# Altium PCB cs301_YourGroupNumber.PcbDoc
Units mm, origin at the board's own origin, x right, y up, seen from the top; angles counter-clockwise.
Board outline 274.95 x 168.53 mm, 2 copper layers (Top Layer, Bottom Layer); 86 components, 64 nets, 340 pads, 0 vias.
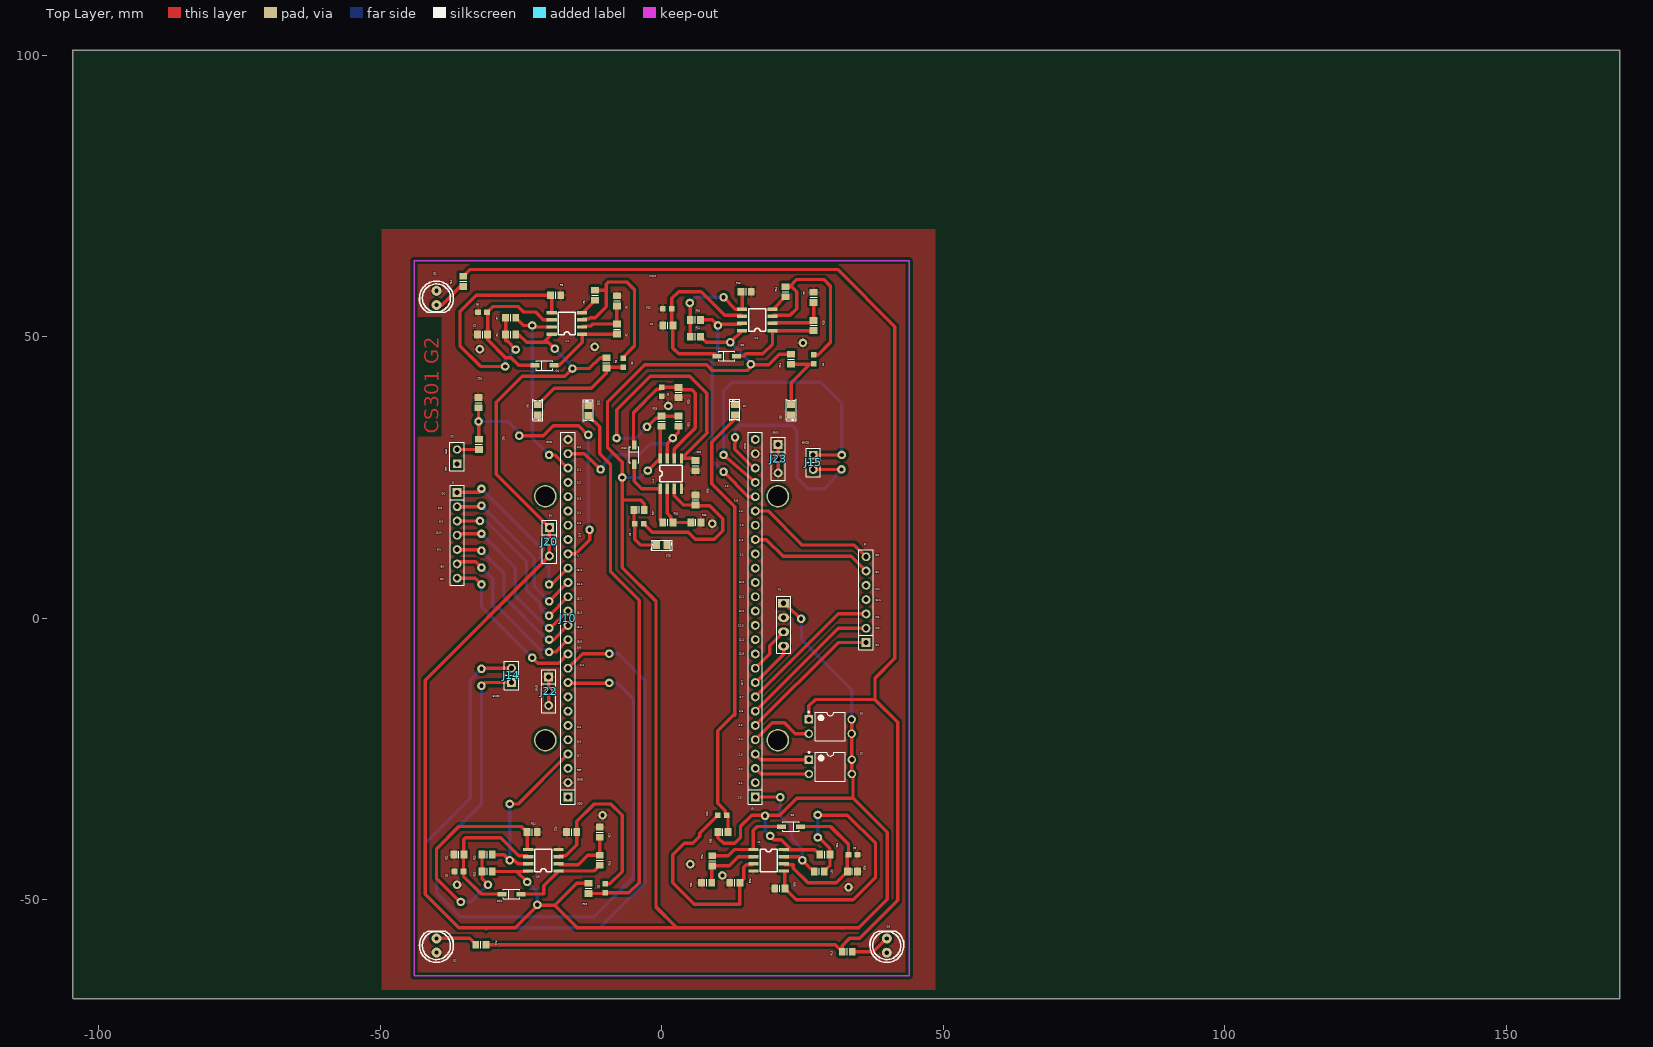
[diagram p0: Top Layer view]
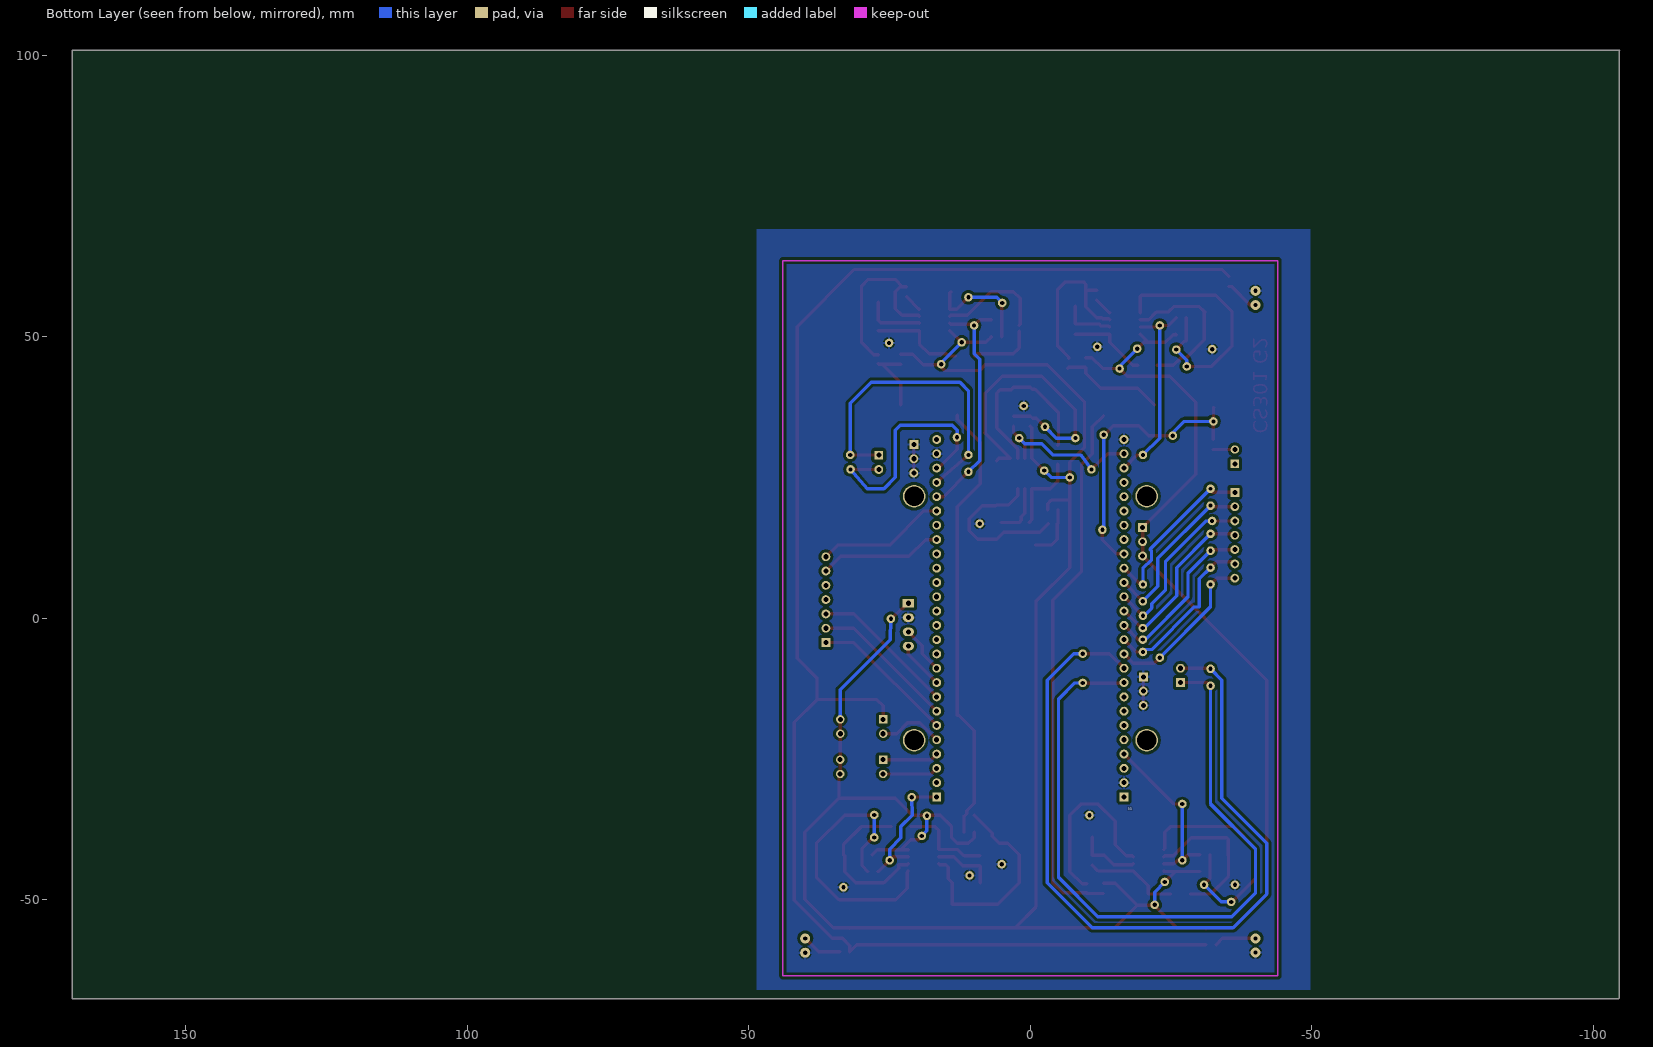
[diagram p1: Bottom Layer view, seen from below]
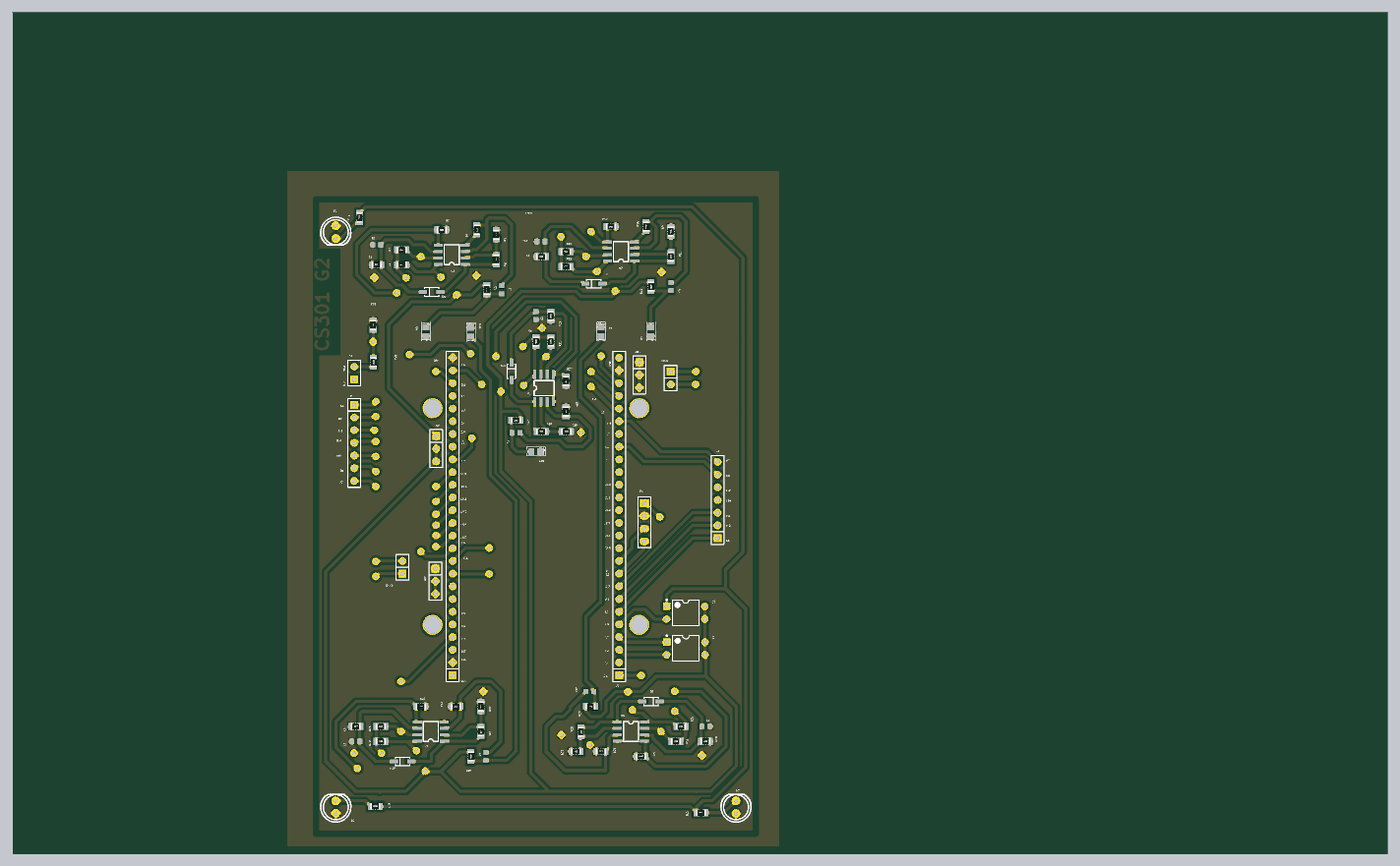
[diagram p2: 3D render of the assembled board from above, using the file's embedded part models]

## Layer stack, top to bottom
Top Solder: solder mask 0.0102, Solder Resist, Dk 3.5
Top Layer: signal copper 0.0356
Dielectric1: dielectric 0.32, FR-4, Dk 4.8
Bottom Layer: signal copper 0.0356
Bottom Solder: solder mask 0.0102, Solder Resist, Dk 3.5

## Board outline
-104.6,-67.48 -104.473,-67.607 170.228,-67.607 170.228,100.922 -104.727,100.922 -104.6,100.795 -104.6,-67.48

## Design rules (kind name [scope] priority, off if disabled: settings)
Clearance [All] p1: gap=0.5 ignorepadtopadclearanceinfootprint=FALSE
PolygonConnect [All] p1: connectstyle=Relief reliefconductorwidth=0.508 reliefentries=4 polygonreliefangle="90 Angle" airgapwidth=0.254
RoomDefinition cs301_YourGroupNumber [InComponentClass('cs301_YourGroupNumber')] p1: confinementstyle=ConfineIn formatcopy=TRUE lockcomponents=FALSE outline 48.625,69.1 -49.7,69.1 -49.7,-66.015 48.625,-66.015
RoutingVias [All] p1: holewidth=0.7 width=1.7 viastyle="Through Hole" minholewidth=0.6 minwidth=1.2 maxholewidth=1 maxwidth=2.2
SilkToSilkClearance [All] p1: silktosilkclearance=0.1
SilkToSolderMaskClearance SilkscreenOverComponentPads [IsPad] p1: minsilkscreentomaskgap=0.1 clearancetoexposedcopper=TRUE
SolderMaskExpansion [All] p1: expansion=0.102
Width [All] p1: maxlimit=0.7 minlimit=0.3 preferedwidth=0.6 minimp=50.000000 maximp=50.000000 favimp=50.000000
28 further rules are at their usual default settings.

## Components (designator, comment, footprint, x,y, rotation, side; value= is the part's Value field where it differs from the comment)
C1 "150nF" ECE-CAPC1608-0603SM 1,55 r180 top
C2 "150nF" ECE-CAPC1608-0603SM -31.821,54.365 r180 top
C3 "15nF" ECE-CAPC1608-0603SM -6.821,45.365 r90 top
C4 "15nF" ECE-CAPC1608-0603SM 27,46 r90 top
C5 "150nF" ECE-CAPC1608-0603SM -36,-45 r180 top
C6 "15nF" ECE-CAPC1608-0603SM -10,-48 r90 top
C7 "150nF" ECE-CAPC1608-0603SM 0,40.2 r270 top
C8 "15nF" ECE-CAPC1608-0603SM -4,16.75 r0 top
C9 "150nF" ECE-CAPC1608-0603SM 34,-42 r0 top
C10 "15nF" ECE-CAPC1608-0603SM 10.8,-35 r180 top
D1 "LED" LED0.1/5MM#1 -40,55.62 r180 top locked
D2 "LED" LED0.1/5MM#2 -40,-56.88 r0 top locked
D3 "LED" LED0.1/5MM#1 40,-56.88 r0 top locked
D4 "1N4148W-7-F" ECE-DIO-SOD123SM -20.825,44.925 r180 top
D5 "1N4148W-7-F" ECE-DIO-SOD123SM 23,-37 r0 top
D6 "TEMT6200" ECE-SENSOR-0805SM -22,37 r90 top
D7 "TEMT6200" ECE-SENSOR-0805SM 13,37 r270 top
D8 "1N4148W-7-F" ECE-DIO-SOD123SM 11.575,46.575 r180 top
D9 "TEMT6200" ECE-SENSOR-0805SM 23,37 r90 top
D10 "1N4148W-7-F" ECE-DIO-SOD123SM -26.65,-49 r180 top
D11 "TEMT6200" ECE-SENSOR-0805SM -13,36.9 r270 top
D12 "1N4148W-7-F" ECE-DIO-SOD123SM -4.875,29.05 r90 top
D13 "TEMT6200" ECE-SENSOR-0805SM 0,13 r180 top
J1 "CON7" SIP7 -36.322,22.352 r270 top locked
J2 "CON7" SIP7 36.322,-4.318 r90 top locked
J9 "26PIN" SIP26 16.637,-31.75 r90 top locked
J10 "26PIN" SIP26 -16.637,-31.75 r90 top locked
J14 "ENCD" sip2 -26.67,-11.43 r90 top locked
J15 "ENCD" sip2 26.924,28.956 r270 top locked
J20 "5V" sip3 -19.939,16.129 r270 top locked
J22 "GND" sip3 -20.066,-10.414 r270 top locked
J23 "GND" sip3 20.701,30.861 r270 top locked
P1 "Serial" ece-HDR1X4 21.675,2.655 r270 top
P2 "Serial" HDR1X2 -36.325,27.425 r90 top
R1 "10k" RESC2012-0805SM -7.941,56.365 r90 top
R2 "56k" RESC2012-0805SM -7.941,51.365 r90 top
R3 "100k" RESC2012-0805SM -9.821,45.365 r90 top
R4 "18k" RESC2012-0805SM -26.821,50.365 r0 top
R5 "820k" RESC2012-0805SM -31.821,50.365 r0 top
R6 "100k" RESC2012-0805SM -11.821,57.365 r90 top
R7 "27k" RESC2012-0805SM -26.821,53.365 r180 top
R8 "2.7k" RESC2012-0805SM -18.821,57.365 r180 top
R9 "10k" RESC2012-0805SM 27,57 r90 top
R10 "56k" RESC2012-0805SM 27,52 r90 top
R11 "100k" RESC2012-0805SM 23,46 r90 top
R12 "18k" RESC2012-0805SM 6,50 r0 top
R13 "820k" RESC2012-0805SM 1.1,52 r0 top
R14 "100k" RESC2012-0805SM 22,58 r90 top
R15 "27k" RESC2012-0805SM 6,53 r180 top
R16 "2.7k" RESC2012-0805SM 15,58 r180 top
R17 "10k" RESC2012-0805SM -11,-38 r90 top
R18 "56k" RESC2012-0805SM -11,-43 r90 top
R19 "100k" RESC2012-0805SM -13,-48 r90 top
R20 "18k" RESC2012-0805SM -31,-45 r0 top
R21 "820k" RESC2012-0805SM -36,-42 r0 top
R22 "100k" RESC2012-0805SM -16,-38 r0 top
R23 "27k" RESC2012-0805SM -31,-42 r180 top
R24 "2.7k" RESC2012-0805SM -23,-38 r180 top
R25 "10k" RESC2012-0805SM 6.1,17 r0 top
R26 "56k" RESC2012-0805SM 1.1,17 r0 top
R27 "100k" RESC2012-0805SM -4,19.25 r0 top
R28 "18k" RESC2012-0805SM 0,35 r270 top
R29 "820k" RESC2012-0805SM 3,40.1 r90 top
R30 "100k" RESC2012-0805SM 6,21 r270 top
R31 "27k" RESC2012-0805SM 3,35 r90 top
R32 "2.7k" RESC2012-0805SM 6,27.1 r90 top
R33 "10k" RESC2012-0805SM 8,-47 r180 top
R34 "56k" RESC2012-0805SM 9,-43.1 r270 top
R35 "100k" RESC2012-0805SM 10.9,-38 r180 top
R36 "18k" RESC2012-0805SM 29,-42 r180 top
R37 "820k" RESC2012-0805SM 33.9,-45 r180 top
R38 "100k" RESC2012-0805SM 13,-47 r0 top
R39 "27k" RESC2012-0805SM 28,-45 r0 top
R40 "2.7k" RESC2012-0805SM 21,-48 r0 top
R41 "47k" RESC2012-0805SM -32.475,30.875 r270 top value=27k
R42 "10k" RESC2012-0805SM -32.55,38.3 r270 top value=27k
RL1 "150K" RESC2012-0805SM -35.25,59.825 r90 top
RL2 "150K" RESC2012-0805SM -32.1,-58 r0 top
RL3 "150K" RESC2012-0805SM 32.975,-59.25 r180 top
S1 "SW DIP-2" DIP-4 29.975,-26.4 r0 top
S2 "SW DIP-2" DIP-4 29.95,-19.25 r0 top
U1 "SMT-TLC082" SO-8 -16.821,52.365 r180 top
U2 "SMT-TLC082" SO-8 17,53 r180 top
U3 "SMT-TLC082" SO-8 -21,-43 r180 top
U4 "SMT-TLC082" SO-8 1.635,25.7 r90 top
U5 "SMT-TLC082" SO-8 19,-43 r0 top

## Footprints (in the part's own frame and the unit in brackets; to place one, negate y for a bottom-side part, rotate by r counter-clockwise, add the part's x,y. Pads: shape width x height; smd on the part's side, far side on the other; paste and mask are expansions set on the pad)
DIP-4 [mm] "DIP; 4 Leads; Row Spacing 7.62 mm; Pitch 2.54 mm"
  rect 1.5x1.5 hole 0.9: 1(-3.81,1.27)
  round 1.5 hole 0.9: 2(-3.81,-1.27) 3(3.81,-1.27) 4(3.81,1.27)
  silkscreen extent -3.93,-2.55 2.65,2.69, body extent -3.15,-2.5 3.15,2.5, height 5.6
ECE-CAPC1608-0603SM [mm] "Chip Capacitor, Body 1.6x0.8mm, IPC Medium Density"
  rect 1x1 smd: 1(-0.8,0) 2(0.8,0)
  body extent -0.87,-0.48 0.87,0.48, height 0.85
ECE-DIO-SOD123SM [mm] "SOD-123; 2 Leads; Body 2.7 x 1.6 mm, (LxW)"
  rect 1.6x0.8 smd: 1(-1.7,0) 2(1.7,0)
  silkscreen extent -1.45,-0.85 1.45,0.85
ece-HDR1X4 [mm] "Header 4 way"
  rect 1.5x2 hole 0.9: 1(0,0)
  oval 1.5x2 hole 0.9: 2(2.54,0) 3(5.08,0) 4(7.62,0)
  silkscreen extent -1.27,-1.27 8.89,1.27
ECE-SENSOR-0805SM [mm] "Chip Sensor, Body 2.0x1.3mm, IPC Medium Density"
  rect 1.2x1.4 smd: 1(-0.9,0) 2(0.9,0)
  silkscreen extent -1.91,-0.89 1.88,0.89
HDR1X2 [mm] "Connector; Header; 2 Position"
  rect 1.5x1.5 hole 0.9: 1(0,0)
  round 1.5 hole 0.9: 2(2.54,0)
  silkscreen extent -1.27,-1.27 3.81,1.27
LED0.1/5MM#1 [mil]
  round 70 hole 30: A(0,0) K(0,-100)
  silkscreen extent -118,-168 118,50
LED0.1/5MM#2 [mil]
  round 70 hole 30: A(0,0) K(0,-98.43)
  silkscreen extent -118,-168 118,50
RESC2012-0805SM [mm] "Chip Resistor, Body 2.0x1.3mm, IPC Medium Density"
  rect 1.2x1.4 smd: 1(-0.9,0) 2(0.9,0)
  silkscreen extent 0,-0.6 0,0.6, body extent -1,-0.62 1,0.63, height 0.5
sip2 [mil]
  rect 62x62 hole 35.43: 1(0,0)
  round 62 hole 35.43: 2(100,0)
  silkscreen extent -50,-50 150,50
sip3 [mil]
  rect 62x62 hole 35.43: 1(0,0)
  round 62 hole 35.43: 2(100,0) 3(200,0)
  silkscreen extent -50,-50 250,50
SIP7 [mil]
  rect 62x62 hole 35.43: 1(0,0)
  round 62 hole 35.43: 2(100,0) 3(200,0) 4(300,0) 5(400,0) 6(500,0) 7(600,0)
  silkscreen extent -50,-50 650,50
SIP26 [mil]
  rect 62x62 hole 35.43: 1(0,0)
  round 62 hole 35.43: 2(100,0) 3(200,0) 4(300,0) 5(400,0) 6(500,0) 7(600,0) 8(700,0) 9(800,0) 10(900,0) 11(1000,0) 12(1100,0) 13(1200,0) 14(1300,0) 15(1400,0) 16(1500,0) 17(1600,0) 18(1700,0) 19(1800,0) 20(1900,0) 21(2000,0) 22(2100,0) 23(2200,0) 24(2300,0) 25(2400,0) 26(2500,0)
  silkscreen extent -50,-50 2550,50
SO-8 [mm]
  rect 1.8x0.6 smd: 1(-2.7,1.905) 2(-2.7,0.635) 3(-2.7,-0.635) 4(-2.7,-1.905) 5(2.7,-1.905) 6(2.7,-0.635) 7(2.7,0.635) 8(2.7,1.905)
  silkscreen extent -1.5,-2 1.5,2, body extent -2,-2.5 2,2.5, height 1.8

## Part data
C1 C2 C5 C7 C9: library part CAP000625, "CAP CER 150nF 25V X7R SM0603", Manufactuer=TDK, Manufacturer-PN=C1608X7R1E154K080AA, Size/Package="0603 (1608 Metric)", Voltage/Current=25V, Assembly Method="Surface Mount", Category=Capacitor, Component Type=CAP-0603-150nF, Item Type=Item, Path="ece/ts/Lists/Stock Inventory", Status=Active, Supplier1=Digikey, Supplier1-PN=445-5190-2-ND, UoA Stock#=CAP000625
C3 C4 C6 C8 C10: library part CAP000619, "CAP CER 15nF 50V X7R SM0603", Manufactuer=Samsung, Manufacturer-PN=CL10B153KB8NNNC, Size/Package="0603 (1608 Metric)", Voltage/Current=50V, Assembly Method="Surface Mount", Category=Capacitor, Component Type=CAP-0603-15nF, Item Type=Item, Path="ece/ts/Lists/Stock Inventory", Status=Active, Supplier1=Digikey, Supplier1-PN=1276-1277-2-ND, UoA Stock#=CAP000619
D4 D5 D8 D10 D12: library part DIO000103, "DIODE GEN PURPOSE 300mA SM", Manufactuer="Diodes Incorporated", Size/Package=SOD123, Voltage/Current="300mA 100V", Assembly Method="Surface Mount", Category=Diode, Component Type=SOD123-4148, Datasheet Link=http://share.engineering.auckland.ac.nz/ece/ts/Student%20Documents/Diode-4148SM.pdf, Item Type=Item, Manufacturer-PN=1N4148W-7-F, Path="ece/ts/Lists/Stock Inventory", Status=Active, Supplier1=Digikey, Supplier1-PN=1N4148W-FDITR-ND, UoA Stock#=DIO000103
D6 D7 D9 D11 D13: library part OTH000001, "LIGHT SENSOR TEMT6200 SM", Manufactuer=Vishay, Manufacturer-PN=TEMT6200FX01, Size/Package=0805/2012, Assembly Method="Surface Mount", Category=Other, Component Type=SEN-0805-TEMT6200, Datasheet Link=http://share.engineering.auckland.ac.nz/ece/ts/Student%20Documents/temt6200.pdf, Item Type=Item, Path="ece/ts/Lists/Stock Inventory", Revision="July-2002: Re-released for DXP Platform.", Status="Non Stocked", Supplier1=Digikey, Supplier1-PN=751-1056-1-ND, UoA Stock#=OTH000001
J1 J2: "Connector"
J14 J15: library part CON2, "Connector"
J20 J22 J23: library part CON3, "Connector"
P1: library part "Header 4", "Header, 4-Pin", LatestRevisionDate=17-Jul-2002, LatestRevisionNote="Re-released for DXP Platform.", Publisher="Altium Limited"
P2: library part "Header 2", "Header, 2-Pin", LatestRevisionDate=17-Jul-2002, LatestRevisionNote="Re-released for DXP Platform.", Publisher="Altium Limited"
R1 R2 R3 R4 R5 R6 R7 R8 R9 R10 R11 R12 R13 R14 R15 R16 R17 R18 R19 R20 R21 R22 R23 R24 R25 R26 R27 R28 R29 R30 R31 R32 R33 R34 R35 R36 R37 R38 R39 R40 R41 R42 RL1 RL2 RL3: library part "Res SM 0805", "SM resistor"
S1 S2: "DIP Switch, 2 Position, SPST", LatestRevisionDate=17-Jul-2002, LatestRevisionNote="Re-released for DXP Platform.", PackageReference=DIP-4, Published=24-Mar-1999, Publisher="Altium Limited"

## Free pads (board coordinates)
  round 4 hole 3.5 unplated: 1(-20.65,-21.666) 1(-20.65,21.666) 1(20.65,-21.666) 1(20.65,21.666)
  round 1.524 hole 0.762: 4(-23,52) 5(10,52) 6(-20,29) 7(11,26) 8(2,32) 9(-10.85,26.425) 10(25,-43) 11(21.075,-31.8) 12(-27,-43) 13(-27,-33) 14(-32,-9) 15(-32,-12) 16(11,57) 17(5,56) 22(-32,12) 24(-32,6) 25(-32,9) 27(-20,6) 28(-19.987,3) 29(-19.975,-1.75) 30(-19.975,-3.8) 31(-20,-6) 32(-20,0.447) 33(-23,-7) 34(11,29) 35(13.05,32.125) 36(32,29) 37(31.95,26.425) 38(-9.3,-6.3) 39(-9.3,-11.5) 40(-11.9,48.2) 41(5.1,-43.7) 42(25.1,48.9) 43(9,16.8) 44(-10.5,-35) 45(-32.3,47.8) 46(1.2,37.7) 47(-36.35,-47.35) 48(33.2,-47.8) 49(10.8,-45.7) 50(12.205,49) 51(15.85,45.125) 53(-15.85,44.35) 54(-25.925,47.725) 55(-27.8,44.719) 56(-18.975,47.875) 57(-2.45,26.225) 58(-7,25) 59(-2.6,34) 60(-8,32) 61(-23.875,-46.85) 62(-22.075,-50.925) 63(-30.85,-47.35) 66(-35.675,-50.4) 67(27.75,-38.95) 68(27.725,-34.95) 69(19.275,-38.675) 70(18.375,-35.1) 73(24.775,-0.1) 74(-32.525,34.95) 75(-25.3,32.425) 76(-13.025,32.575) 77(-12.8,15.7)
  round 1.524 hole 0.7: 18(-32,23) 19(-32,20) 20(-32.272,17.272) 21(-32,15)

## Nets (pads, with @x,y where several pads share a name; then routed paths per layer and width w, separated by ;. In a path a pad name is that pad's centre, name@x,y a point inside that pad or via, vN(x,y) a via of type N, cw(c..) or ccw(c..) an arc to the next point about the centre after c; other vN are vias at no path point)
DIP0: J9.4 S1.1 | length 9.9
  Top Layer w0.6: J9.4 17.637,-25.13 S1.1
DIP1: J9.3 S1.2 | length 9.9
  Top Layer w0.6: J9.3 17.637,-27.67 S1.2
DIP2: RL1.2 RL2.2 RL3.2 S2.1 | length 279.1
  Top Layer w0.6: RL1.2 -34.025,61.95 31.25,61.95 41.4,51.8 41.4,-7.15 37.9,-10.65 37.9,-14.45 ; RL2.2 30.825,-58 RL3.2 32.075,-58.15 33.375,-56.85 35.225,-56.85 41.95,-50.125 41.95,-18.5 37.9,-14.45 ; S2.1 26.14,-15.56 27.25,-14.45 37.9,-14.45
DIP3: J9.5 S2.2 | length 11.5
  Top Layer w0.6: J9.5 19.627,-18.6 21.825,-18.6 23.745,-20.52 S2.2
ENCD_J14_1: J10.9 J14.1 pad.15 pad.39 | length 130.2
  Top Layer w0.6: pad.15 -31.43,-11.43 J14.1 ; J10.9 -16.51,-11.557 -9.3,-11.557 pad.39
  Bottom Layer w0.6: pad.15 -32,-33 -40,-41 -40,-48.8 -35.8,-53 -12,-53 -5,-46 -5,-14.4 -7.9,-11.5 pad.39 ; J10.9 J10.9@-16.32,-11.43
ENCD_J14_2: J10.10 J14.2 pad.14 pad.38 | length 147
  Top Layer w0.6: pad.14 -31.89,-8.89 J14.2 ; J10.10 -14.047,-6.3 pad.38
  Bottom Layer w0.6: pad.14 -34,-11 -34,-32 -42,-40 -42,-49 -36,-55 -11,-55 -3,-47 -3,-11 -7.7,-6.3 pad.38
ENCD_J15_1: J9.23 J15.1 pad.34 pad.36 | length 56.3
  Top Layer w0.6: pad.34 J9.23 ; J15.1 pad.36
  Bottom Layer w0.6: pad.34 11,40.413 12.497,41.91 28.245,41.91 32,38.155 pad.36
ENCD_J15_2: J9.24 J15.2 pad.35 pad.37 | length 43.9
  Top Layer w0.6: pad.35 13,30 16.33,26.67 J9.24 ; J15.2 pad.37
  Bottom Layer w0.6: pad.35 13,33.396 13.868,34.265 23.136,34.265 24,33.401 24,25 26,23 29,23 pad.37
GND: C1.2 C2.2 C5.2 C7.2 C9.2 D1.K D2.K D3.K D6.1 D7.1 D9.1 D11.1 D13.1 J9.25 J10.2 J10.26 J22.1 J22.2 J22.3 J23.1 J23.2 J23.3 P1.2 pad.40 pad.41 pad.42 pad.43 pad.44 pad.45 pad.46 pad.47 pad.48 pad.49 R1.2 R5.1 R6.1 R8.1 R9.2 R13.1 R14.1 R16.1 R17.2 R21.1 R22.1 R24.1 R25.2 R29.1 R30.1 R32.1 R33.2 R37.1 R38.1 R40.1 R42.1 U1.4 U2.4 U3.4 U4.4 U5.4 | length 16.6
  Top Layer w0.6: J22.3 J22.2 J22.1 ; U1.4 -14.016,54.27 R6.1 ; U2.4 19.805,54.905 R14.1 ; J23.3 J23.2 J23.1
J1_1: J1.7 J10.11 pad.24 pad.33 | length 29
  Top Layer w0.6: J1.7 -33.112,7.112 pad.24 ; pad.33 -22,-8 -18.287,-8 J10.11
  Bottom Layer w0.6: pad.24 -32,2 pad.33
J1_2: J1.6 J10.12 pad.25 pad.31 | length 30.3
  Top Layer w0.6: J1.6 -35.974,10 -33,10 pad.25 ; pad.31 -18.827,-6 J10.12
  Bottom Layer w0.6: pad.25 -30,7 -30,2 -29.124,2 -21.562,-5.562 -20.438,-5.562 pad.31
J1_3: J1.5 J10.13 pad.22 pad.30 | length 30.1
  Top Layer w0.6: J1.5 -32.192,12.192 pad.22 ; pad.30 -19.167,-3.8 J10.13
  Bottom Layer w0.6: pad.22 -28,8 -28,3.791 -20.409,-3.8 pad.30 pad.30@-20.209,-4
J1_4: J1.4 J10.14 pad.21 pad.29 | length 30.9
  Top Layer w0.6: J1.4 -36.054,15 pad.21 ; pad.29 -19.75,-1.75 -16.73,1.27 J10.14
  Bottom Layer w0.6: pad.21 -26,9 -26,4 -20.25,-1.75 pad.29
J1_5: J1.3 J10.15 pad.20 pad.32 | length 31.4
  Top Layer w0.6: J1.3 pad.20 ; pad.32 J10.15
  Bottom Layer w0.6: pad.20 -31.272,17.272 -24,10 -24,5 -21.549,2.549 -21.549,1.804 -20.192,0.447 pad.32
J1_6: J1.2 J10.16 pad.19 pad.28 | length 31.1
  Top Layer w0.6: J1.2 -32.188,19.812 pad.19 ; pad.28 J10.16
  Bottom Layer w0.6: pad.19 -22.626,10.626 -22.626,5.639 pad.28
J1_7: J1.1 J10.17 pad.18 pad.27 | length 31
  Top Layer w0.6: J1.1 -32.352,22.352 pad.18 ; pad.27@-19.527,6 J10.17
  Bottom Layer w0.6: pad.18 -21.297,12.297 -21.297,12.164 -21.526,11.935 -21.526,10.391 -20,8.865 pad.27
J2_1: J2.1 J9.6 | length 25.8
  Top Layer w0.6: J9.6 31.369,-4.318 J2.1
J2_2: J2.2 J9.7 | length 25.8
  Top Layer w0.6: J9.7 31.369,-1.778 J2.2
J2_3: J2.3 J9.8 | length 25.8
  Top Layer w0.6: J9.8 31.369,0.762 J2.3
J2_6: J2.6 J9.19 | length 22
  Top Layer w0.6: J9.19 18.595,13.97 21.565,11 33.704,11 J2.6
J2_7: J2.7 J9.21 | length 23.1
  Top Layer w0.6: J9.21 18.95,19.05 25,13 34.244,13 J2.7
NetC1_1: C1.1 D8.2 R13.2 U2.6 | length 31.2
  Top Layer w0.6: 2,51 2,48 3,47 9.45,47 D8.2 ; R13.2 1.8,52.2 C1.1 1.8,56.8 3,58 7,58 11.195,53.805 14.13,53.805 U2.6
NetC2_1: C2.1 D4.2 R5.2 U1.6 | length 28.1
  Top Layer w0.6: D4.2 -25.4,44.925 -26.756,46.281 -27.737,46.281 -30.921,49.465 R5.2 -30.921,54.265 C2.1 -30.021,55.365 -25.489,55.365 -24.521,54.396 -22.396,54.396 -21,53 U1.6
NetC3_1: C3.1 D6.2 R3.1 | length 18.8
  Top Layer w0.6: D6.2 -22,37.925 -19.088,40.838 -12.462,40.838 -9.821,43.479 R3.1 -9.721,44.565 C3.1 C3.1@-6.621,44.365
NetC3_2: C3.2 R6.2 U1.3 | length 30.1
  Top Layer w0.6: U1.3 -13.951,53.17 -12.889,53.17 -12.694,53.365 -11.82,53.365 -9.821,55.365 -9.821,58.365 ; R6.2 -9.921,58.265 -9.821,58.365 ; C3.2 -6.821,46.365 -4.821,48.365 -4.821,58.365 -6.181,59.725 -9.461,59.725 -9.821,59.365 -9.821,58.365
NetC4_1: C4.1 D9.2 R11.1 | length 12.6
  Top Layer w0.6: D9.2 23,41.825 26.275,45.1 ; R11.1 26.275,45.1 ; C4.1 26.9,45.1 26.275,45.1
NetC4_2: C4.2 R14.2 U2.3 | length 32.4
  Top Layer w0.6: U2.3 19.87,53.805 22.805,53.805 24,55 24,58 23.1,58.9 22.725,58.9 ; R14.2 22.725,58.9 ; C4.2 27.8,46.8 30,49 30,59 28.825,60.175 24,60.175 22.725,58.9
NetC5_1: C5.1 D10.2 R21.2 U3.6 | length 27.7
  Top Layer w0.6: D10.2 -32,-49 -35.2,-45.8 C5.1 -35.2,-42.1 R21.2 -35.125,-41.975 -35.125,-39.275 -34.85,-39 -28.595,-39 -25.4,-42.195 -23.87,-42.195 U3.6
NetC6_1: C6.1 D11.2 R19.1 | length 96.5
  Top Layer w0.6: R19.1 -10.1,-48.9 C6.1 -5.8,-48.8 -4,-47 -4,3.15 -9.075,8.225 -9.075,27.3 -11.025,29.25 -11.025,34.025 D11.2
NetC6_2: C6.2 R22.2 U3.3 | length 32.3
  Top Layer w0.6: U3.3 -18.13,-42.195 -17.069,-42.195 -15.1,-40.226 R22.2 -15.1,-36.1 -12,-33 -9,-33 -7,-35 -7,-45 -9.2,-47.2 C6.2
NetC7_1: C7.1 D12.2 R29.2 U4.6 | length 32.2
  Top Layer w0.6: D12.2 -5,30.875 -5,36.531 -0.831,40.7 -0.3,40.7 C7.1 R29.2 3.4,40.6 5.4,40.6 6,40 6,33.791 2.27,30.061 U4.6
NetC8_1: C8.1 D13.2 R27.1 | length 9.6
  Top Layer w0.6: R27.1 -4.9,16.85 C8.1 -4.8,14.05 -3.75,13 D13.2
NetC8_2: C8.2 R30.2 U4.3 | length 29.5
  Top Layer w0.6: C8.2 -1.7,15.25 4.75,15.25 6,14 9.35,14 10.85,15.5 10.85,17.7 8.55,20 6.1,20 R30.2 3.9,20.1 2.27,21.73 U4.3
NetC9_1: C9.1 D5.2 R37.2 U5.6 | length 28.6
  Top Layer w0.6: U5.6 21.87,-43.805 23.4,-43.805 23.4,-44.4 26,-47 31,-47 R37.2 33,-42.2 C9.1 33.2,-40.2 30,-37 D5.2
NetC10_1: C10.1 D7.2 R35.1 | length 79.6
  Top Layer w0.6: R35.1 11.8,-35.2 C10.1 11.3,-34.7 11.3,-34.169 10,-32.869 10,-20 12.75,-17.25 12.975,-17.25 12.975,19.8 8.9,23.875 8.9,31.225 13,35.325 D7.2
NetC10_2: C10.2 R38.2 U5.3 | length 38.4
  Top Layer w0.6: C10.2 6.8,-38.2 6.8,-38.7 5.5,-40 4,-40 2,-42 2,-47 5.8,-50.8 13.9,-50.8 R38.2 14.6,-46.3 14.6,-44.274 15.069,-43.805 16.13,-43.805 U5.3
NetD1_A: D1.A RL1.1 | length 6.1
  Top Layer w0.6: D1.A -39.08,55.62 -35.775,58.925 RL1.1
NetD2_A: D2.A RL2.1 | length 7.5
  Top Layer w0.6: D2.A -34.12,-56.88 RL2.1
NetD3_A: D3.A RL3.1 | length 7.1
  Top Layer w0.6: RL3.1 37.63,-59.25 D3.A
NetD4_1: D4.1 R2.1 U1.1 | length 14.3
  Top Layer w0.6: D4.1 -18.181,44.925 -14.121,48.985 U1.1 -14.115,50.465 R2.1
NetD5_1: D5.1 R34.1 U5.1 | length 16.4
  Top Layer w0.6: R34.1 11.8,-42.2 12.905,-41.095 U5.1 16.3,-37.7 17,-37 D5.1
NetD8_1: D8.1 R10.1 U2.1 | length 17
  Top Layer w0.6: D8.1 14.55,46.575 14.975,47 18,47 19.7,48.7 U2.1 26.995,51.095 R10.1
NetD10_1: D10.1 R18.1 U3.1 | length 16.9
  Top Layer w0.6: D10.1 -20.92,-49 -20.92,-47.525 U3.1 -12.005,-44.905 R18.1
NetD12_1: D12.1 R26.1 U4.1 | length 14.4
  Top Layer w0.6: D12.1 -4.875,24.35 -3.525,23 U4.1 -0.27,17.47 R26.1
NetP2_2: P2.2 R41.2 | length 3.9
  Top Layer w0.6: P2.2 -32.485,29.965 R41.2
NetR1_1: R1.1 R2.2 U1.2 | length 9.6
  Top Layer w0.6: U1.2 -13.951,51.9 -12.604,51.9 -12.238,52.265 R2.2 R1.1
NetR4_1: pad.54 pad.55 R4.1 R7.2 R8.2 U1.5 | length 46.4
  Top Layer w0.6: pad.55 -32.175,44.719 -35.821,48.365 -35.821,54.479 -32.935,57.365 R8.2 -19.521,57.165 U1.5 ; R7.2 R4.1 -27.721,49.265 -27.465,49.265 pad.54
  Bottom Layer w0.6: pad.55 -27.8,45.85 pad.54
NetR9_1: R9.1 R10.2 U2.2 | length 10.8
  Top Layer w0.6: U2.2 19.7,52.5 26.6,52.5 R10.2 R9.1
NetR12_1: pad.16 pad.17 R12.1 R15.2 R16.2 U2.5 | length 19.8
  Top Layer w0.6: pad.17 5.1,55.9 R15.2 R12.1 ; pad.16 13.095,54.905 U2.5 14.3,57.8 R16.2
  Bottom Layer w0.6: pad.17 6,57 pad.16
NetR17_1: R17.1 R18.2 U3.2 | length 11.3
  Top Layer w0.6: U3.2 -18.13,-43.805 -14.805,-43.805 -13.1,-42.1 R18.2 R17.1
NetR20_1: pad.63 pad.66 R20.1 R23.2 R24.2 U3.5 | length 44.6
  Top Layer w0.6: pad.66@-35.6,-50.6 -35.738,-50.463 -40,-46.2 -40,-41 -36,-37 -24.9,-37 R24.2 -23.9,-40.895 U3.5 ; R23.2 R20.1 -31.9,-46.3 pad.63
  Bottom Layer w0.6: pad.66 -33.9,-50.4 pad.63
NetR25_1: R25.1 R26.2 U4.2 | length 9.6
  Top Layer w0.6: U4.2 1,18.631 1.6,18.031 1.6,17.4 R26.2 R25.1
NetR28_1: pad.59 pad.60 R28.1 R31.2 R32.2 U4.5 | length 53.5
  Top Layer w0.6: pad.60 -8,37 -2,43 5,43 8,40 8,33 8.07,32.93 U4.5 5.6,28.4 R32.2 ; pad.59 -2.531,34 -1.031,35.5 -0.4,35.5 R28.1 R31.2
  Bottom Layer w0.6: pad.60 -4.6,32 pad.59
NetR33_1: R33.1 R34.2 U5.2 | length 11
  Top Layer w0.6: R33.1 8.9,-44.1 R34.2 12,-44 13.635,-42.365 U5.2
NetR36_1: pad.67 pad.68 R36.1 R39.2 R40.2 U5.5 | length 51.8
  Top Layer w0.6: U5.5 21.9,-45.105 R40.2 23.9,-50 34,-50 38,-46 38,-40 33,-35 pad.68@27.525,-35 ; pad.67 28,-39 29.9,-40.9 R36.1 29.9,-44 R39.2
  Bottom Layer w0.6: pad.68 27.725,-38.925 pad.67
RX: J9.10 P1.3 | length 8.6
  Top Layer w0.6: J9.10 19.225,-6.302 19.225,-4.875 P1.3
TX: J9.9 P1.4 | length 8.6
  Top Layer w0.6: J9.9 21.675,-6.392 P1.4
Vbat: J10.18 pad.74 pad.75 pad.76 pad.77 R41.1 R42.2 | length 51.6
  Top Layer w0.6: R42.2 -32.525,37.375 pad.74 -32.475,34.9 R41.1 ; pad.75 -21.025,32.425 -19.275,34.175 -14.725,34.175 pad.76@-13,32.45 ; J10.18 -15.27,11.43 -12.8,13.9 pad.77
  Bottom Layer w0.6: pad.74 -27.325,34.95 -25.3,32.925 pad.75 ; pad.76 -13.025,15.925 pad.77
VCC: J20.1 J20.2 J20.3 P1.1 pad.50 pad.51 pad.53 pad.56 pad.57 pad.58 pad.61 pad.62 pad.69 pad.70 pad.73 R3.2 R4.2 R11.2 R12.2 R19.2 R20.2 R27.2 R28.2 R35.2 R36.2 S1.3 S1.4 S2.3 S2.4 U1.8 U2.8 U3.8 U4.8 U5.8 | length 524.8
  Top Layer w0.6: -31.2,-55.2 -31,-55 ; R20.2 -25.725,-45 ; R4.2@-25.826,50.46 R4.2 -25.365,50.365 -24,49 -20.981,49 ; pad.61 -25.725,-45 ; U3.8 -23.795,-45 -25.725,-45 ; pad.62 pad.62@-22,-51 ; U1.8 -20.981,49 ; pad.56 -20.1,49 -20.981,49 ; R19.2 -15.1,-47.1 -19,-51 ; R3.2 -10.921,46.265 -12.821,44.365 -15.821,44.365 -17.186,43 -24.8,43 -29.4,38.4 -29.4,25.59 J20.1 J20.2 J20.3 -42,-11.012 -42,-49 -36,-55 -31,-55 ; R27.2 -3.1,20.35 -3.75,21 -7,21 ; pad.57 -2.445,26.225 U4.8 -0.27,33.83 R28.2 ; R12.2@7,50 R12.2 7.9,49 pad.50 U2.8 ; R35.2 10,-39 10.995,-39.995 13.005,-39.995 14,-39 14,-37 16,-35 21,-35 24,-32 34,-32 ; pad.69 19.925,-39.325 21.275,-39.325 23.05,-41.1 ; P1.1 pad.73 ; U5.8 21.705,-41.1 23.05,-41.1 ; R11.2 20.9,46.9 19,45 16.205,45 15.205,44 9,44 8,45 -3,45 -9.625,38.375 -9.625,30.35 -7,27.725 pad.58 -7,21 ; R36.2 27.2,-41.1 23.05,-41.1 ; 32.1,-55.1 32,-55 ; S2.4 S2.3 33.76,-25.105 S1.4 S1.3 34,-27.885 34,-32 ; -31,-55 -26,-55 pad.62@-22,-51 ; pad.62@-22,-51 -19,-51 ; -19,-51 -15,-55 2.7,-55 ; -7,21 -7,9 -1,3 -1,-51.3 2.7,-55 ; 2.7,-55 32,-55 ; 32,-55 35,-55 40.05,-49.95 40.05,-38.05 34,-32
  Bottom Layer w0.6: pad.61 -22.075,-48.65 pad.62 ; pad.56 -15.85,44.75 pad.53 ; pad.58 -3.675,25 pad.57 ; pad.50 15.85,45.355 pad.51 ; pad.70 18.375,-37.775 pad.69 ; pad.73 24.895,-3.845 33.76,-12.71 S2.4
Vout1: J10.24 pad.4 pad.6 R7.1 U1.7 | length 35.6
  Top Layer w0.6: R7.1 -24.556,52 pad.4 -22.73,51.73 U1.7 ; pad.6 -18.967,29 J10.24
  Bottom Layer w0.6: pad.4 -23,32 pad.6
Vout2: J9.22 pad.5 pad.7 R15.1 U2.7 | length 42.8
  Top Layer w0.6: R15.1 9,53 pad.5 10,52.195 14.13,52.195 U2.7 ; pad.7 15.41,21.59 J9.22
  Bottom Layer w0.6: pad.5 10,47 9,46 9,28 pad.7
Vout3: J10.25 pad.8 pad.9 R31.1 U4.7 | length 28.8
  Top Layer w0.6: J10.25 -13.785,29.21 pad.9 ; U4.7 1,31 pad.8 3,33 R31.1
  Bottom Layer w0.6: pad.9 -9,29 -4,29 -2,31 1,31 pad.8
Vout4: J10.4 pad.12 pad.13 R23.1 U3.7 | length 31.1
  Top Layer w0.6: R23.1 -28,-42 pad.12 -26.151,-43 -25.516,-43.635 U3.7 ; pad.13 -25.507,-33 J10.4
  Bottom Layer w0.6: pad.12 pad.13
Vout5: J9.1 pad.10 pad.11 R39.1 U5.7 | length 23.8
  Top Layer w0.6: J9.1 21.025,-31.75 pad.11 ; U5.7 24.365,-42.365 pad.10 27,-45 R39.1
  Bottom Layer w0.6: pad.11 21,-35 23,-37 23,-39 25,-41 pad.10
pads on no net: J2.4 J2.5 J9.2 J9.11 J9.12 J9.13 J9.14 J9.15 J9.16 J9.17 J9.18 J9.20 J9.26 J10.1 J10.3 J10.5 J10.6 J10.7 J10.8 J10.19 J10.20 J10.21 J10.22 J10.23 P2.1

## Polygon pours and split planes (outlines as drawn)
GND on Bottom Layer "GND Layer" (solid, pour order 18): -49.7,69.1 48.6,69.1 48.6,-66 -49.7,-66
GND on Top Layer "GND Layer" (solid, pour order 16): -49.7,69.1 48.625,69.1 48.625,-66.015 -49.7,-66.015

## Keep-outs
Keep-Out Layer:
  lines w0.254: -43.942,-63.5 -43.942,63.5 43.942,63.5 43.942,-63.5 -43.942,-63.5

## Other copper
Top Layer:
  text "CS301 G2" at -39.575,32.75 h2.5 r90

## Silkscreen, mask and mechanical layers (free items; w line width, h text height)
Top Overlay:
  text "Front" at -2.1,60.6 h0.35
  text "GND" at -20.5,31.1 h0.35
  text "3.0" at -15,30.2 h0.35
  text "GND" at 15,30 h0.35 r90
  text "Vbat" at -38.1,29 h0.35 r90
  text "3.1" at -14.986,26.162 h0.35
  text "Ibat" at -38.15,26.075 h0.35 r90
  text "3.2" at -15.025,23.875 h0.35
  text "1.6" at 11.2,23.3 h0.35
  text "D1" at -39.075,21.95 h0.35
  text "3.3" at -14.986,21.082 h0.35
  text "1.5" at 12.925,20.7 h0.35
  text "IN2" at -39.7,19.35 h0.35
  text "1.4" at 13.7,18.8 h0.35
  text "3.4" at -14.986,18.542 h0.35
  text "IN1" at -39.475,16.975 h0.35
  text "3.5" at -15.025,16.7 h0.35
  text "1.3" at 13.9,16.3 h0.35
  text "SLW" at -40,15 h0.35
  text "3.6" at -14.375,14.35 h0.35 r90
  text "1.2" at 13.8,13.7 h0.35
  text "INV" at -39.825,12 h0.35
  text "1.1" at 13.9,11.1 h0.35
  text "D2" at 38,11 h0.35
  text "3.7" at -14.986,10.922 h0.35
  text "EN" at -39.2,9 h0.35
  text "15.0" at -15.113,8.382 h0.35
  text "EN" at 38,8 h0.35
  text "D2" at -39.3,6.725 h0.35
  text "12.0" at 13.7,6.2 h0.35
  text "15.1" at -14.986,5.842 h0.35
  text "INV" at 38,5 h0.35
  text "12.1" at 13.7,3.6 h0.35
  text "15.2" at -15.113,3.302 h0.35
  text "SLW" at 38,3 h0.35
  text "12.2" at 13.7,1.1 h0.35
  text "15.3" at -15.113,0.762 h0.35
  text "IN1" at 38,0 h0.35
  text "12.3" at 13.6,-1.5 h0.35
  text "15.4" at -15.113,-1.778 h0.35
  text "IN2" at 38,-2 h0.35
  text "12.4" at 13.7,-4 h0.35
  text "15.5" at -15.113,-4.318 h0.35
  text "D1" at 38,-5 h0.35
  text "0.0" at -15,-5.4 h0.35
  text "12.5" at 13.7,-6.5 h0.35
  text "0.1" at -14.5,-8.5 h0.35
  text "12.7" at 14.5,-12 h0.35 r90
  text "2.7" at 13.9,-14.2 h0.35
  text "2.6" at 13.8,-16.7 h0.35
  text "2.5" at 13.7,-19.2 h0.35
  text "0.5" at -14.986,-19.558 h0.35
  text "2.4" at 13.7,-21.7 h0.35
  text "0.6" at -14.986,-22.098 h0.35
  text "2.3" at 13.7,-24.4 h0.35
  text "0.7" at -14.986,-24.638 h0.35
  text "2.2" at 13.7,-27 h0.35
  text "RST" at -14.986,-27.178 h0.35
  text "GND" at -14.986,-28.829 h0.35
  text "2.1" at 13.7,-29.5 h0.35
  text "2.0" at 13.5,-32.1 h0.35
  text "VDD" at -14.986,-33.147 h0.35